# Altium PCB PCB_ROBOT_HUT_BUI.PcbDoc
Units mil, origin at the board's own origin, x right, y up, seen from the top; angles counter-clockwise.
Board outline 2813.48 x 3251.55 mil, 2 copper layers (Top Layer, Bottom Layer); 37 components, 47 nets, 170 pads, 6 vias.
Unrouted connection lines stored in the file: 1.
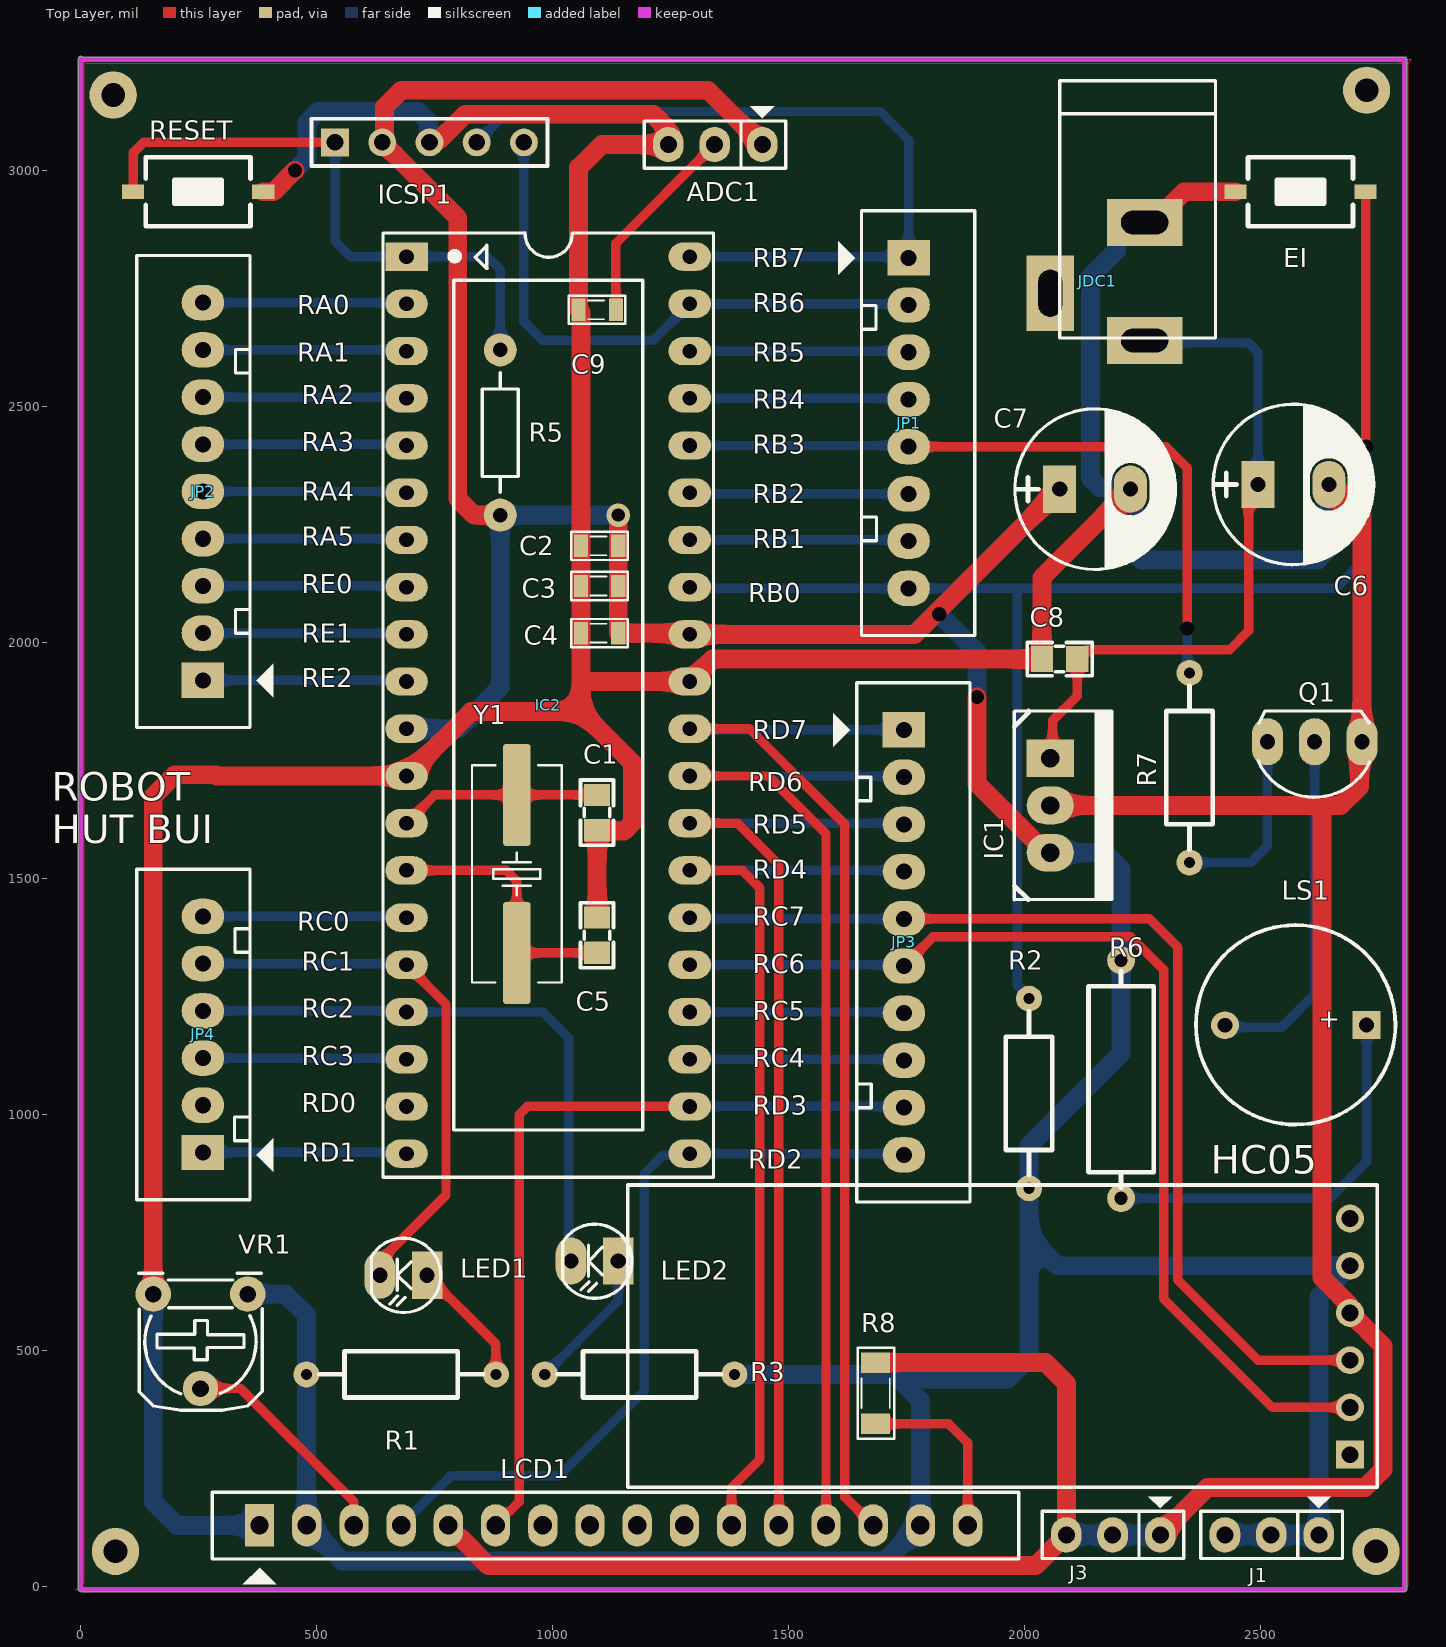
[diagram p0: Top Layer view]
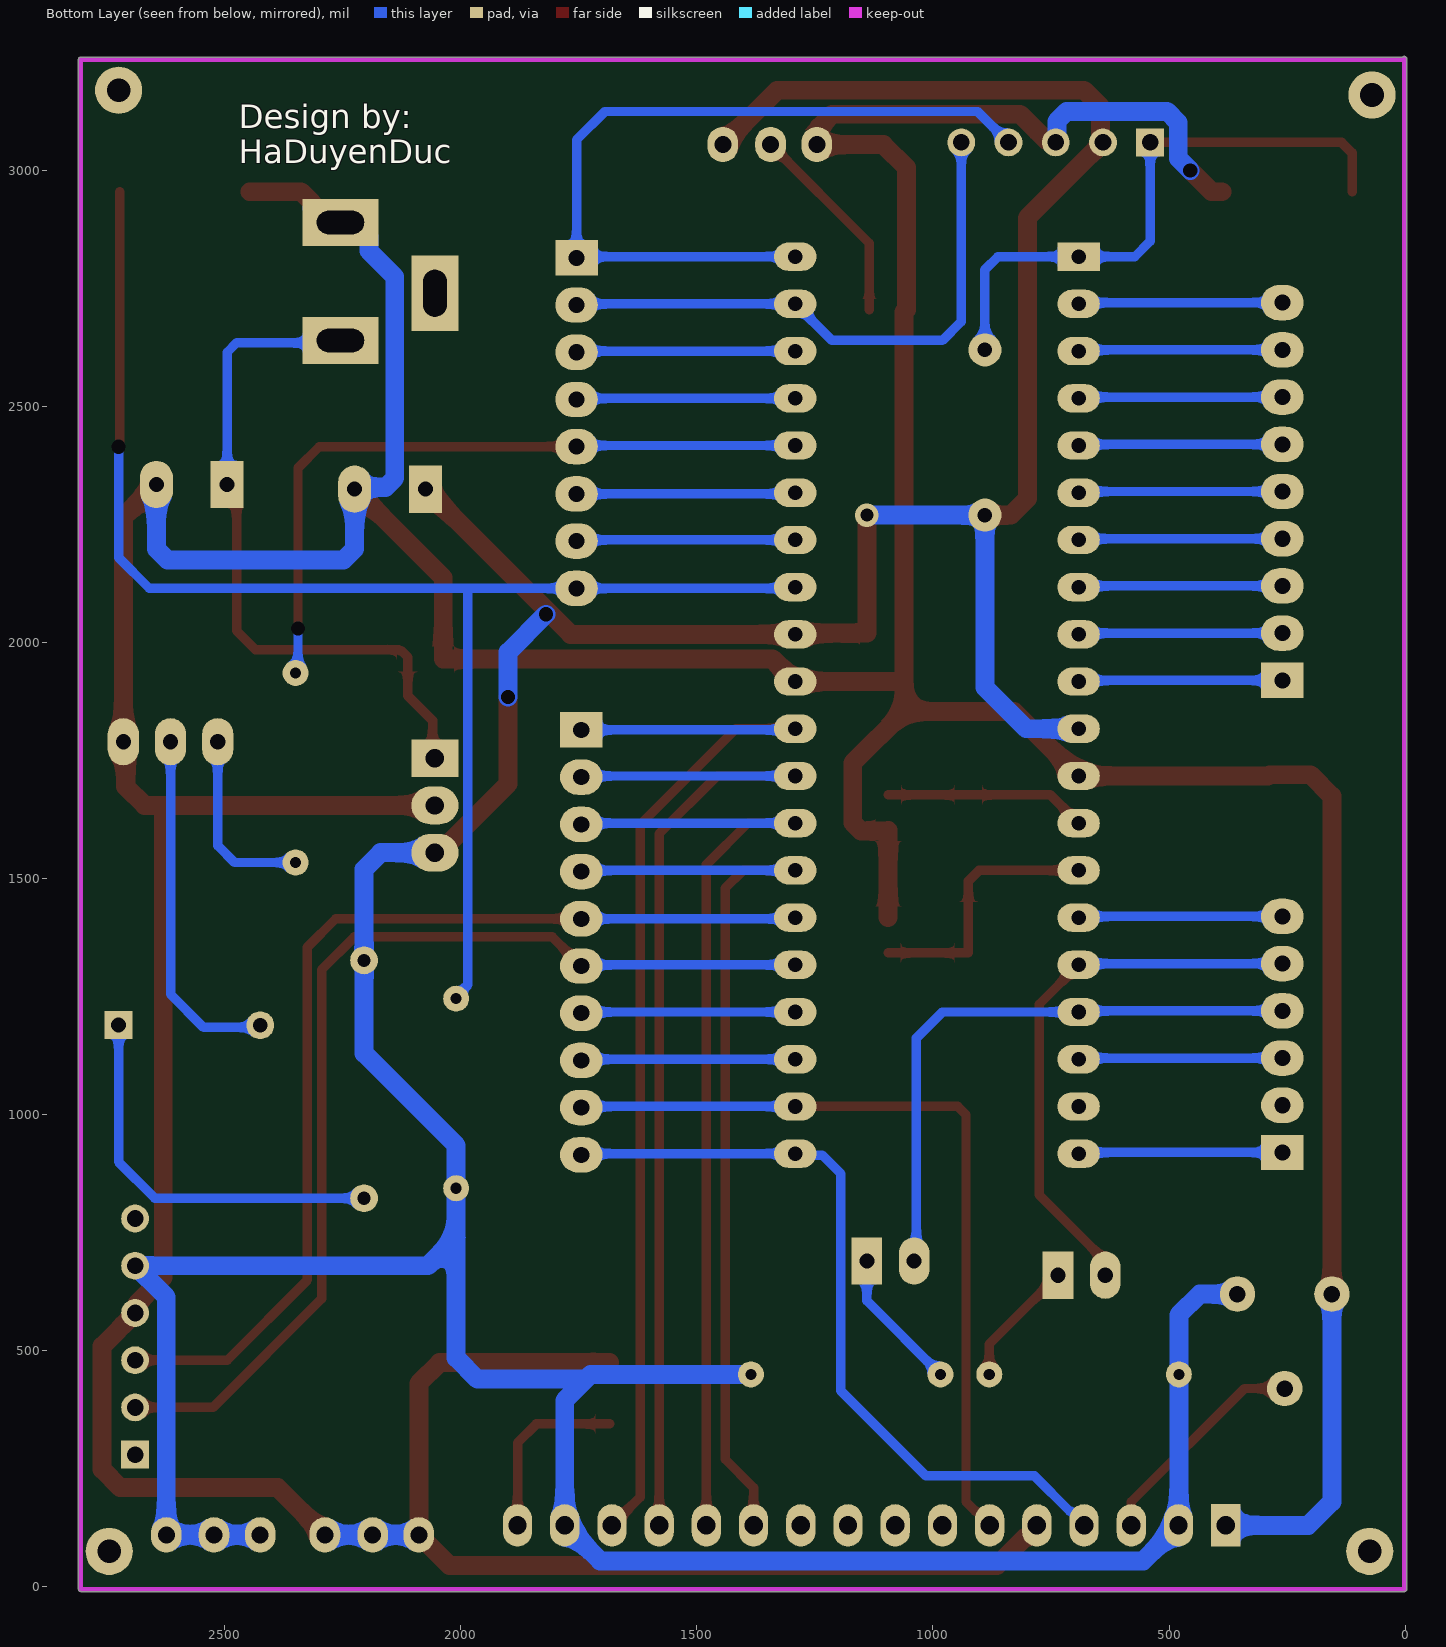
[diagram p1: Bottom Layer view, seen from below]

## Layer stack, top to bottom
Top Solder: solder mask 0.4, Solder Resist, Dk 3.5
Top Layer: signal copper 1.4
Dielectric 1: dielectric 12.6, FR-4, Dk 4.8
Bottom Layer: signal copper 1.4
Bottom Solder: solder mask 0.4, Solder Resist, Dk 3.5

## Board outline
-3.46,-5 ccw(c1.55,-5) 1.55,-10.02 2805,-10.02 ccw(c2805,-5) 2810.02,-5 2810.02,3235 ccw(c2805,3235) 2805,3240.02 5.18,3240.02 ccw(c1.57,3236.51) -3.46,3236.55

## Design rules (kind name [scope] priority, off if disabled: settings)
Clearance POLYGON [InPolygon] p1: gap=30 ignorepadtopadclearanceinfootprint=FALSE except(0: Arc-Hole Track-Hole SMDPad-Hole THPad-Hole Via-Hole Fill-Hole Poly-Hole Region-Hole Text-Hole)
Clearance [All] p2: gap=10 ignorepadtopadclearanceinfootprint=FALSE except(0: Arc-Hole Track-Hole SMDPad-Hole THPad-Hole Via-Hole Fill-Hole Poly-Hole Region-Hole Text-Hole)
DiffPairsRouting [All] p1: maxlimit=10 minlimit=10 mostfreqgap=10 toplayer_minwidth=10 toplayer_maxwidth=40 toplayer_prefwidth=20 bottomlayer_minwidth=10 bottomlayer_maxwidth=40 bottomlayer_prefwidth=20 maxuncoupledlength=500
PolygonConnect [All] p1: connectstyle=Relief reliefconductorwidth=10 reliefentries=4 polygonreliefangle="90 Angle" airgapwidth=10
RoutingVias [All] p1: holewidth=28 width=50 viastyle="Through Hole" minholewidth=20 minwidth=10 maxholewidth=30 maxwidth=15
SolderMaskExpansion [All] p1: expansion=4 istentingtop=FALSE
Width [All] p1: maxlimit=40 minlimit=10 preferedwidth=20
29 further rules are at their usual default settings.

## Components (designator, comment, footprint, x,y, rotation, side; value= is the part's Value field where it differs from the comment)
ADC1 "Jumper 3" JP3 1345,3055 r180 top value=J3
C1 "33pF" "tu 0805" 1095,1640 r270 top
C2 "104" SM-CAP-0805 1055,2205 r0 top value=0,1uF/300V
C3 "104" SM-CAP-0805 1055,2120 r0 top value=0,1uF/300V
C4 "104" SM-CAP-0805 1055,2020 r0 top value=0,1uF/300V
C5 "33pF" "tu 0805" 1095,1380 r90 top
C6 "100uF/35V" CP1.5/3.4 2495,2335 r0 top value=100uF/35V/50V
C7 "1000uF/16V" CP1.5/3.4 2075,2325 r0 top
C8 "104" "tu 0805" 2075,1965 r180 top
C9 "104" SM-CAP-0805 1050,2705 r0 top value=0,1uF/300V
EI "Nut Nhan 2 Chan SMD 3x6x2.5" "Nut Nhan 2 Chan SMD 3x6x2.5" 2585,2955 r180 top (schematic designator BT2)
HC05 "HC05 Bluetooth" "HC05 Bluethooth Nam" 2690,280 r90 top locked value="Connector 6"
IC1 "LM7805" QTO-220 2055,1755 r270 top
IC2 "16F877A" DIP40/W0.6 691.5,2817.48 r270 top locked
ICSP1 "ICSP-PIC" HDR1X5 540,3059.56 r0 top
J1 "Jumper 3" JP3 2524,110 r180 top value=J3
J3 "Jumper 3" JP3 2188,110 r180 top value=J3
JDC1 "Jac DC" DC-IN 2155,2765 r270 top
JP1 "JP8" CON8 1755,2815 r270 top value="Connector 8"
JP2 "connector" con9 260,1920 r90 top
JP3 "JP10" CON10 1745,1815 r270 top locked value="Connector 10"
JP4 "JP6" CON6 260,920 r90 top value="Connector 6"
LCD1 "LCD1602 XL" "LCD1602 with Jump" 380,130 r0 top locked
LED1 "LED" LED-3 735,660 r180 top value="LED 3 ly Single Colour"
LED2 "LED" LED-3 1140,690 r180 top value="LED 3 ly Single Colour"
LS1 "Coi Chip Speaker" "Coi Chip Speacker" 2725,1190 r180 top
Q1 "C1815" TO92 2615,1790 r180 top value=C9014
R1 "270R" "tro vach 1/4w" 680,450 r0 top
R2 "10k" "tro vach 1/4w" 2010,1045 r90 top
R3 "270R" "tro vach 1/4w" 1185,450 r180 top
R5 "10k" R1/4W 890,2620 r270 top
R6 "220k" "tro vach 1/2w" 2205,1075 r90 top
R7 "5.6k" "tro vach 1/4w" 2350,1735 r270 top
R8 "100" SM-RES-1206 1685,475 r270 top value="R1/4W - 1K"
RESET "Nut Nhan 2 Chan SMD 3x6x2.5" "Nut Nhan 2 Chan SMD 3x6x2.5" 250,2955 r180 top (schematic designator BT1)
VR1 "10K" VR 355,620 r180 top value="VR 10K"
Y1 "16Mhz" "Thach Anh 2 chan SMD" 925,1510 r90 top value=4Mhz

## Footprints (in the part's own frame and the unit in brackets; to place one, negate y for a bottom-side part, rotate by r counter-clockwise, add the part's x,y. Pads: shape width x height; smd on the part's side, far side on the other; paste and mask are expansions set on the pad)
"Coi Chip Speacker" [mm]
  rect 1.5x1.5 hole 0.8: 1(0,0)
  round 1.5 hole 0.8: 2(7.62,0.013)
  silkscreen extent -1.55,-5.38 9.18,5.36, body extent -2.22,-6 13.24,6, height 4.5
CON6 [mil] "CON6"
  rect 75x90 hole 34: 1(0,0)
  oval 75x90 hole 34: 2(100,0) 3(200,0) 4(300,0) 5(400,0) 6(500,0)
  silkscreen extent -100,-150 600,140, body extent -93,-91 592,135, height 276
CON8 [mil] "CON8"
  rect 75x90 hole 34: 1(0,0)
  oval 75x90 hole 34: 2(100,0) 3(200,0) 4(300,0) 5(400,0) 6(500,0) 7(600,0) 8(700,0)
  silkscreen extent -100,-150 800,140, body extent -92,-95 790,132, height 245
con9 [mil]
  rect 75x90 hole 34: 1(0,0)
  oval 75x90 hole 34: 2(100,0) 3(200,0) 4(300,0) 5(400,0) 6(500,0) 7(600,0) 8(700,0) 9(800,0)
  silkscreen extent -100,-150 900,140
CON10 [mil] "CON10"
  rect 75x90 hole 34: 1(0,0)
  oval 75x90 hole 34: 2(100,0) 3(200,0) 4(300,0) 5(400,0) 6(500,0) 7(600,0) 8(700,0) 9(800,0) 10(900,0)
  silkscreen extent -100,-150 1000,140
CP1.5/3.4 [mil] "Tu hoa 220->470uF,16V, 470uF/16V,25V"
  rect 70x100 hole 32: 1(0,0)
  oval 70x100 hole 32: 2(150,0)
  silkscreen extent -95,-170 245,170, body extent -85,-157 230,157, height 446
DC-IN [mil] "Jac DC input"
  rect 100x160 hole 50 slot 100 at 90 deg: 1(125,100) 2(-125,100)
  rect 160x100 hole 50 slot 100 at 0 deg: 3(25,-100)
  silkscreen extent -425,-80 120,250, body extent -410,-105 134,269, height 434
DIP40/W0.6 [mil] "40 PIN, W 600mil, Pin to pin 100mil"
  rect 60x90 hole 31: 1(0,0)
  oval 60x90 hole 31: 2(100,0) 3(200,0) 4(300,0) 5(400,0) 6(500,0) 7(600,0) 8(700,0) 9(800,0) 10(900,0) 11(1000,0) 12(1100,0) 13(1200,0) 14(1300,0) 15(1400,0) 16(1500,0) 17(1600,0) 18(1700,0) 19(1800,0) 20(1900,0) 21(1900,600) 22(1800,600) 23(1700,600) 24(1600,600) 25(1500,600) 26(1400,600) 27(1300,600) 28(1200,600) 29(1100,600) 30(1000,600) 31(900,600) 32(800,600) 33(700,600) 34(600,600) 35(500,600) 36(400,600) 37(300,600) 38(200,600) 39(100,600) 40(0,600)
  silkscreen extent -50,-50 1950,650, body extent -82,-10 1982,600, height 224
"HC05 Bluethooth Nam" [mm] "Connector; Header; 6 Position"
  rect 1.5x1.5 hole 0.9: 1(0,0)
  round 1.5 hole 0.9: 2(2.54,0) 3(5.08,0) 4(7.62,0) 5(10.16,0) 6(12.7,0)
  silkscreen extent -1.76,-1.46 14.51,38.86, body extent -1.52,-0.64 14.48,38.78, height 4.05
HDR1X5 [mm] "Connector; Header; 5 Position"
  rect 1.5x1.5 hole 0.9: 1(0,0)
  round 1.5 hole 0.9: 2(2.54,0) 3(5.08,0) 4(7.62,0) 5(10.16,0)
  silkscreen extent -1.27,-1.27 11.43,1.27, body extent -1.38,-1.26 11.57,1.24, height 8.52
JP3 [mil] "Jumper 3"
  oval 65x75 hole 36: 1(-100,0) 2(1,0) 3(99,0)
  silkscreen extent -150,-81 150,50, body extent -150,-60 150,55, height 355
"LCD1602 with Jump" [mil] "LCD dipslay 16x2, 16 pin"
  rect 62x90 hole 39: 1(0,0)
  oval 62x90 hole 39: 2(100,0) 3(200,0) 4(300,0) 5(400,0) 6(500,0) 7(600,0) 8(700,0) 9(800,0) 10(900,0) 11(1000,0) 12(1100,0) 13(1200,0) 14(1300,0) 15(1400,0) 16(1500,0)
  silkscreen extent -100,-125 1608,70, body extent -320,-1353 2850,84, height 764
LED-3 [mil] "LED 2 PIN, 3ly Only colour"
  rect 65x100 hole 32: 1(0,0)
  oval 65x100 hole 32: 2(100,0)
  silkscreen extent -29,-78 118,79, body extent -29,-75 109,75, height 256
"Nut Nhan 2 Chan SMD 3x6x2.5" [mm] "Switch SMD type"
  rect 1.2x0.8 smd: 1(-3.5,0) 2(3.5,0)
  silkscreen extent -2.82,-1.85 2.82,1.85, body extent -3.05,-1.85 3.05,1.85, height 2.5
QTO-220 [mil] "TO-220 - 1-2-3"
  rect 80x100 hole 39: 1(0,0)
  oval 80x100 hole 39: 2(100,0) 3(200,0)
  silkscreen extent -100,-76 300,130, body extent -119,-64 322,121, height 905
R1/4W [mil] "R 1/4W, 2 Pin, 350mil"
  round 70 hole 31: 1(0,0) 2(350,0)
  silkscreen extent 48,-38 302,38, body extent -40,-47 386,47, height 111
SM-CAP-0805 [mil]
  rect 30x47.24 smd: 1(6,0) 2(85,0)
  silkscreen extent -15,-30 105,30, body extent 6,-25 84,25, height 31
SM-RES-1206 [mm]
  rect 1.1x1.55 smd: 1(0,0) 2(3.302,0)
  silkscreen extent -0.8,-0.97 4.1,1, body extent 0.05,-0.8 3.25,0.8, height 1.02
"Thach Anh 2 chan SMD" [mm] "SMD Crystal HC49/US-SM package"
  round 0.508 on Mech15: 0(0,0)
  rrect25% 5.5x1.5 smd: 1(-4.25,0) 2(4.25,0)
  silkscreen extent -5.84,-2.41 5.84,2.41, body extent -6.4,-2.41 6.4,2.42, height 4.29
TO92 [mil] "TO-92"
  oval 66x100 hole 32: 1(-100,0) 2(0,0) 3(100,0)
  silkscreen extent -117,-65 120,118, body extent -109,-66 109,95, height 245
"tro vach 1/2w" [mm]
  round 1.5 hole 0.7: 1(-6.4,0) 2(6.4,0)
  silkscreen extent -5.84,-1.75 5.84,1.75, body extent -6.62,-1.75 6.62,1.75, height 3.5
"tro vach 1/4w" [mm]
  round 1.4 hole 0.6: 1(-5.1,0) 2(5.1,0)
  silkscreen extent -4.39,-1.25 4.42,1.25, body extent -5.38,-1.2 5.38,1.2, height 2.41
"tu 0805" [mm] "Compoment SMD 80x50mil"
  rect 1.2x1.4 smd: 1(-0.946,-0.003) 2(0.954,-0.003)
  silkscreen extent -1.75,-0.89 1.75,0.89, body extent -1.01,-0.64 1.01,0.63, height 0.61
VR [mil] "Resistor Variable"
  round 75 hole 35: 1(0,0) 2(100,200) 3(200,0)
  silkscreen extent -31,-44 231,246, body extent -87,-30 307,372, height 165

## Part data
ADC1 J1 J3: library part JP3
C1 C5: library part "Tu 0805 33pF 50V 10%", "Dán", Chung_Loai=Dán, Don_Vi=Con, Ma_Hang=MH004563, So_Chan=2, Ten_Linh_Kien="Tụ 0805 33p 10% 50V"
C2 C3 C4 C9: library part "CAP SMD", Designed by=VanDungEvn
C6: library part CP3, "Cap 100uF/35V - 470uF/16V", Description 1="1000uF/6,3V - 470uF/16V - 330uF - 25V", Description 2="220uF/35V - 100uF/50V - 63V - 4,7uF/200V", Description 3="22uF => 33uF100V - 3,3uF => 4,7uF/250V", Description 4="2,2uF =>3,3uF/350 - 2,2uF/400V - 1uF/450V"
C7: library part CP4, "Cap 1000uF/16V - 220uF/50V", Description 1="2200uF-3300uF/6,3V - 1000uF-2200uF/10V", Description 2="1000uF/16V - 470uF => 1000uF/25V - 100uF/100V", Description 3=330uF>470uF/35V_220uF>470uF/50V_10uF>22uF/250V, Description 4="220uF => 330uF/63V - 10uF =>33uF/160 - 200V", Description 5="4,7uF>10uF/250V_3,3uF>10uF/400V - 2,2uF>4,7uF/450V"
C8: library part "Tu 0805 104 50V 10%", "Dán", Chung_Loai=Dán, Don_Vi=Con, Ma_Hang=MH004551, So_Chan=2, Ten_Linh_Kien="Tụ 0805 104-100nF 10% 50V"
HC05: "Bluetooth HC05"
IC1: library part LM78xx, "On ap +, from + 5 to + 24VDC"
IC2: library part "PIC 16F877A"
ICSP1: "Header, 5-Pin", LatestRevisionDate=17-Jul-2002, LatestRevisionNote="Re-released for DXP Platform.", Publisher="Altium Limited"
JDC1: library part DCIN, "Jac DC input"
JP1: library part Con8, "Connector 8"
JP2: library part Con9, "connector 9"
JP3: library part Con10, "Connector 10"
JP4: library part Con6, "Connector 6"
LCD1: "LCD 1602 Xanh Lá", CHIP=HD44780, Ma_Hang=67HZ, NCC=NSHOP, Ten="Màn hình LCD 1602 Xanh Lá"
LED1 LED2: "LED Single colour Green and Red"
LS1: "Còi chip"
Q1: "NPN transistor"
R1 R3: library part "Tro Vach 1/4W 5% 270R", "Cắm", Chung_Loai=Cắm, Don_Vi=Con, Ma_Hang=MH007303, So_Chan=2, Ten_Linh_Kien="Trở Vạch 1/4w 5% 270R"
R2: library part "Tro Vach 1/4W 1% 10k", "Cắm", Chung_Loai=Cắm, Don_Vi=Con, Ma_Hang=MH006349, So_Chan=2, Ten_Linh_Kien="Trở Vạch 1/4w 1% 10k"
R5: library part Res, "Res"
R6: library part "Tro Vach 1/2W 5% 220k", "Cắm", Chung_Loai=Cắm, Don_Vi=Con, Ma_Hang=MH006190, So_Chan=2, Ten_Linh_Kien="Trở 5% 1/2w 220k"
R7: library part "Tro Vach 1/4W 5% 5.6k", "Cắm", Chung_Loai=Cắm, Don_Vi=Con, Ma_Hang=MH007323, So_Chan=2, Ten_Linh_Kien="Trở Vạch 1/4w 5% 5.6k"
R8: library part R, "Resistor 1/4W"
VR1: library part VR, "Var Resistor"
Y1: library part "Thach Anh 2 chan SMD", "Crystal For all Crystal 2pin."
EI RESET: Ma_Hang=MH001036, Ten="Nút Nhấn 2 Chân 3x6x2.5MM SMD"

## Free pads (board coordinates)
  round 100 hole 50: 2(70,3160) 3(2725,3170) 4(2745,75) 5(75,75)

## Via types
v1: diameter 15/15 (per signal layer), hole 30, Top Layer to Bottom Layer, tented both sides, 5 vias
v2: diameter 50/50 (per signal layer), hole 28, Top Layer to Bottom Layer, tented both sides, 1 vias

## Nets (pads, with @x,y where several pads share a name; then routed paths per layer and width w, separated by ;. In a path a pad name is that pad's centre, name@x,y a point inside that pad or via, vN(x,y) a via of type N, cw(c..) or ccw(c..) an arc to the next point about the centre after c; other vN are vias at no path point)
5V: ADC1.1 C2.2 C3.2 C4.2 C7.1 HC05.5 IC1.3 IC2.11 IC2.32 ICSP1.2 J1.1 J1.2 J1.3 LCD1.2 LCD1.15 R1.1 R2.1 R3.1 R5.2 R6.2 VR1.1 | length 10365.4
  Top Layer w40: R5.2 835,2270 800,2305 800,2899.56 ICSP1.2 643.65,3063.21 643.65,3076.68 645,3078.04 645,3135 680,3170 1330,3170 ADC1.1 ; v2(1140,2270) C2.2 C3.2 C4.2 1288.98,2020 IC2.32 IC2.32@1297.48,2017.48 ; IC2.32@1300,2020 IC2.32@1297.48,2017.48 ; v1(1900,1885) 1900,1701.01 2046.01,1555 IC1.3 ; C7.1 2075,2310 2060,2295 2045,2295 1767.48,2017.48 IC2.32@1297.48,2017.48
  Bottom Layer w40: VR1.1 435,620 479.21,575.79 R1.1 479.21,130.79 LCD1.2 480,121.95 496.95,105 504.73,105 554.73,55 1705.27,55 1762.06,111.79 1769.84,111.79 1780,121.95 LCD1.15 1780,395 1735,440 ; IC2.11 802.48,1817.48 890,1905 R5.2 v2(1140,2270) ; R3.1 1725,450 1735,440 ; v1(1820,2060) 1900,1980 v1(1900,1885) ; IC1.3 2170,1555 2205,1520 R6.2 2205,1130 2010,935 R2.1 2010,740 ; J1.3 J1.2 J1.1 2624,614 HC05.5 2070,680 2010,740 ; 1735,440 1965,440 2010,485 2010,740
GND: ADC1.3 C1.2 C2.1 C3.1 C4.1 C5.2 C6.2 C7.2 C8.2 C9.1 EI.2 HC05.4 IC1.2 IC2.12 IC2.31 ICSP1.3 J3.1 J3.2 J3.3 JDC1.2 LCD1.1 LCD1.5 Q1.1 R8.1 RESET.1 VR1.3 | length 14504.7
  Top Layer w40: VR1.3 155,1675 200,1720 287.48,1720 290,1717.48 IC2.12 ; RESET.1 410,2955 v1(455,3000) ; IC2.12@710.33,1736.31 828.02,1854 1061,1854 ; ICSP1.3 743.65,3063.21 759.46,3063.21 815.34,3119.09 1214.09,3119.09 1241.22,3091.96 1241.22,3059.78 ADC1.3 1105,3055 1056,3006 C9.1 1061,2700 C2.1 C3.1 C4.1 1061,1920 ; LCD1.5 780,121.95 796.95,105 804.73,105 864.73,45 2024,45 J3.3 2089,431 2045,475 R8.1 ; C1.2 C1.2@1095.13,1602.16 ; C5.2 C1.2@1095.13,1602.16 ; IC1.2 2630,1655 ; C7.2 2225,2318.12 2201.88,2295 2195,2295 2037.43,2137.43 C8.2 1339.93,1965.13 1310.33,1935.53 1310.33,1926.72 1301.09,1917.48 IC2.31 1063.52,1917.48 1061,1920 ; JDC1.2 2285,2890 2315,2920 2315,2931.57 2338.43,2955 EI.2 ; J3.1 2388,210 2721.48,210 2760,248.52 2760,510 HC05.4 2686.35,583.65 2686.35,599.46 2630.47,655.34 2630.47,1654.53 2630,1655 ; C6.2 2645,2328.12 2668.12,2305 2675,2305 2715,2265 Q1.1 2710.03,1785.03 Q1.1@2710.03,1749.64 ; Q1.1@2710,1749.62 2710,1695 2670,1655 2630,1655 ; 1061,1854 1061,1920 ; 1061,1854 1170,1745 1170,1618.43 1152.45,1600.88 1096.41,1600.88 C1.2@1095.13,1602.16
  Bottom Layer w40: VR1.3 155,180 205,130 LCD1.1 ; v1(455,3000) 480.47,3025.47 480.47,3101.52 503.96,3125 716.57,3125 737.7,3103.87 737.7,3061.87 ICSP1.3 ; J3.3 J3.2 J3.1 ; JDC1.2@2315,2920 2285,2890 JDC1.2 2225,2890 2195,2860 2195,2830 2140,2775 2140,2348.43 2159.54,2328.89 2221.11,2328.89 C7.2 2225,2198.43 2248.43,2175 2621.57,2175 2645,2198.43 C6.2
NetADC1_2: ADC1.2 C9.2 | length 436.6
  Top Layer w20: C9.2 1135,2846 ADC1.2
NetC6_1: C6.1 C8.1 IC1.1 JDC1.1 | length 1472.4
  Top Layer w20: IC1.1 2060,1760 2060,1835 2112.23,1887.23 C8.1 2112.23,1969.07 2125.85,1982.69 2129.79,1982.69 2132.09,1985 2435,1985 2475,2025 2475,2315 C6.1
  Bottom Layer w20: JDC1.1 2260,2635 2475,2635 2495,2615 C6.1
NetLCD1_3: LCD1.3 VR1.2 | length 474.4
  Top Layer w20: VR1.2 340,420 580,180 LCD1.3
NetLCD1_16: LCD1.16 R8.2 | length 386.6
  Top Layer w20: R8.2 1840,345 1880,305 LCD1.16
NetLED1_1: LED1.1 R1.2 | length 270.4
  Top Layer w20: LED1.1 880.79,514.21 R1.2
NetLED2_1: LED2.1 R3.2 | length 318.7
  Top Layer w20: R3.2 R3.2@984.21,464.21
  Bottom Layer w20: R3.2 1140,605.79 LED2.1
NetLS1_1: LS1.1 R6.1 | length 841.9
  Bottom Layer w20: R6.1 2648.03,823.03 2725,900 LS1.1
NetLS1_2: LS1.2 Q1.2 | length 755.9
  Bottom Layer w20: LS1.2 2429.5,1185 2545,1185 2615,1255 Q1.2
NetQ1_3: Q1.3 R7.2 | length 399.8
  Bottom Layer w20: R7.2 2479.21,1534.21 2515,1570 Q1.3
OSC1: C1.1 IC2.13 Y1.2 | length 428.1
  Top Layer w20: IC2.13 751.34,1677.32 Y1.2 C1.1@1094.77,1677.32
OSC2: C5.1 IC2.14 Y1.1 | length 565.2
  Top Layer w20: IC2.14 902.52,1517.48 925,1495 Y1.1 C5.1@1095.04,1342.68
PGC: IC2.39 ICSP1.5 JP1.2 | length 1240.7
  Bottom Layer w20: ICSP1.5 940,2680 980,2640 1214.02,2640 IC2.39 JP1.2@1752.52,2717.48
PGD: IC2.40 ICSP1.4 JP1.1 | length 1678
  Bottom Layer w20: ICSP1.4 905.44,3125 1695,3125 1755,3065 JP1.1 ; IC2.40 JP1.1@1752.52,2817.48
RA0: IC2.2 JP2.9 | length 429
  Bottom Layer w20: JP2.9 IC2.2@688.98,2720
RA1: IC2.3 JP2.8 | length 429
  Bottom Layer w20: JP2.8 IC2.3@688.98,2620
RA2: IC2.4 JP2.7 | length 429
  Bottom Layer w20: JP2.7 IC2.4@688.98,2520
RA3: IC2.5 JP2.6 | length 429
  Bottom Layer w20: JP2.6 IC2.5@688.98,2420
RA4: IC2.6 JP2.5 | length 429
  Bottom Layer w20: JP2.5 IC2.6@688.98,2320
RA5: IC2.7 JP2.4 | length 429
  Bottom Layer w20: JP2.4 IC2.7@688.98,2220
RB0: EI.1 IC2.33 JP1.8 R2.2 | length 3119
  Top Layer w20: EI.1 2722.8,2417.2 v1(2725,2415)
  Bottom Layer w20: IC2.33 1293.98,2115 JP1.8 1980,2115 ; R2.2 2010,1250.06 1985,1275.06 1985,2110 1980,2115 ; v1(2725,2415) 2725,2180 2660,2115 1980,2115
RB1: IC2.34 JP1.7 | length 461
  Bottom Layer w20: IC2.34 JP1.7@1752.52,2217.48
RB2: IC2.35 JP1.6 | length 461
  Bottom Layer w20: IC2.35@1293.98,2315 JP1.6
RB3: IC2.36 JP1.5 R7.1 | length 1509.5
  Top Layer w20: JP1.5 2300,2415 2345,2370 v1(2345,2030)
  Bottom Layer w20: IC2.36 1752.52,2417.48 JP1.5 ; v1(2345,2030) 2345,1940.79 R7.1
RB4: IC2.37 JP1.4 | length 461
  Bottom Layer w20: IC2.37 JP1.4@1752.52,2517.48
RB5: IC2.38 JP1.3 | length 461
  Bottom Layer w20: IC2.38 JP1.3@1752.52,2617.48
RC0: IC2.15 JP4.6 | length 429
  Bottom Layer w20: JP4.6 IC2.15@688.98,1420
RC1: IC2.16 JP4.5 LED1.2 | length 1179
  Top Layer w20: LED1.2 635,690 775,830 775,1233.98 IC2.16
  Bottom Layer w20: JP4.5 IC2.16@688.98,1320
RC2: IC2.17 JP4.4 LED2.2 | length 1269.8
  Bottom Layer w20: JP4.4 IC2.17@688.98,1220 ; IC2.17 980,1217.48 1035,1162.48 1035,695 LED2.2
RC3: IC2.18 JP4.3 | length 429
  Bottom Layer w20: JP4.3 IC2.18@688.98,1120
RC4: IC2.23 JP3.8 | length 451
  Bottom Layer w20: IC2.23 JP3.8@1742.52,1117.48
RC5: IC2.24 JP3.7 | length 451
  Bottom Layer w20: IC2.24 JP3.7@1742.52,1217.48
RC6: HC05.2 IC2.25 JP3.6 | length 2246.1
  Top Layer w20: JP3.6 1806.5,1376.5 2225.52,1376.5 2295,1307.01 2295,610 2525,380 HC05.2
  Bottom Layer w20: IC2.25 1742.52,1317.48 JP3.6
RC7: HC05.3 IC2.26 JP3.5 | length 2199.8
  Top Layer w20: JP3.5 2265,1415 2325,1355 2325,650 2495,480 HC05.3
  Bottom Layer w20: IC2.26 1293.98,1415 JP3.5
RD0: IC2.19 JP4.2
RD1: IC2.20 JP4.1 | length 429
  Bottom Layer w20: JP4.1 IC2.20@688.98,920
RD2: IC2.21 JP3.10 LCD1.4 | length 1659.7
  Bottom Layer w20: LCD1.4 680,132.63 707.5,160.13 710.13,160.13 785,235 1015,235 1195,415 1195,875 1234.56,914.56 1288.58,914.56 IC2.21 JP3.10@1742.52,917.48
RD3: IC2.22 JP3.9 LCD1.6 | length 1712
  Top Layer w20: LCD1.6 880,132.63 907.5,160.13 910.13,160.13 930,180 930,1000 947.48,1017.48 IC2.22
  Bottom Layer w20: IC2.22 JP3.9@1742.52,1017.48
RD4: IC2.27 JP3.4 LCD1.11 | length 1989.9
  Top Layer w20: IC2.27 1402.52,1517.48 1440,1480 1440,270 1380,210 LCD1.11
  Bottom Layer w20: IC2.27 JP3.4@1742.52,1517.48
RD5: IC2.28 JP3.3 LCD1.12 | length 2075.8
  Top Layer w20: IC2.28 1392.52,1617.48 1480,1530 LCD1.12
  Bottom Layer w20: IC2.28 JP3.3@1742.52,1617.48
RD6: IC2.29 JP3.2 LCD1.13 | length 2255.3
  Top Layer w20: IC2.29 1457.52,1717.48 1580,1595 LCD1.13
  Bottom Layer w20: IC2.29 JP3.2@1742.52,1717.48
RD7: IC2.30 JP3.1 LCD1.14 | length 2373.2
  Top Layer w20: IC2.30 1417.52,1817.48 1620,1615 1620,190 LCD1.14
  Bottom Layer w20: IC2.30@1293.98,1815 JP3.1
RE0: IC2.8 JP2.3 | length 432.5
  Bottom Layer w20: JP2.3 688.98,2120 IC2.8
RE1: IC2.9 JP2.2 | length 429
  Bottom Layer w20: JP2.2 IC2.9@688.98,2020
RE2: IC2.10 JP2.1 | length 429
  Bottom Layer w20: JP2.1 IC2.10@688.98,1920
RST: IC2.1 ICSP1.1 R5.1 RESET.2 | length 1273.7
  Top Layer w20: RESET.2 112.2,3037.2 134.56,3059.56 ICSP1.1
  Bottom Layer w20: ICSP1.1 540,2850 572.52,2817.48 IC2.1 862.52,2817.48 890,2790 R5.1
pads on no net: HC05.1 HC05.6 JDC1.3 LCD1.7 LCD1.8 LCD1.9 LCD1.10 Y1.0

## Polygon pours and split planes (outlines as drawn)
no net on Bottom Layer "NONET_L02_P000" (solid, shelved, pour order 0): 0,3240 5,3235 2805,3235 2805,-5 0,-5
no net on Top Layer "NONET_L01_P005" (solid, shelved, pour order 5): 5,3235 2805,3235 2812.5,3227.5 2805,3220 2805,-5 5,-5 0,0 5,5
no net on Top Layer "NONET_L01_P004" (solid, shelved, pour order 4): 6.88,3233.12 2791.88,3233.12 2802.5,3222.5 2802.5,-7.5 7.5,-7.5 5,-5 6.88,-3.12
no net on Top Layer "NONET_L01_P003" (solid, shelved, pour order 3): 5,3235 2790,3235 2802.5,3222.5 2802.5,-7.5 12.5,-7.5 2.5,2.5 8.75,8.75 8.75,3231.25
GND on Top Layer "NONET_L01_P001" (solid, shelved, pour order 1): -10,-5 2805,-5 2805,3220 2820,3235 5,3235 5,5 0,0 10,-10 20,-10
no net on Top Layer "NONET_L01_P002" (solid, shelved, pour order 2): 5,-7.5 5,3235 12.5,3227.5 2812.5,3227.5 2812.5,2.5 2802.5,-7.5

## Keep-outs
Keep-Out Layer:
  lines w10: 1.55,-5 2805,-5 2805,3235 26.06,3235 3.1,3235 1.55,3236.55 1.55,-5

## Silkscreen, mask and mechanical layers (free items; w line width, h text height)
Top Overlay:
  text "RB7" at 1425,2795 h40
  text "RB6" at 1425,2700 h40
  text "RA0" at 460,2695 h40
  text "RA1" at 460,2595 h40
  text "RB5" at 1425,2595 h40
  text "RA2" at 470,2505 h40
  text "RB4" at 1425,2495 h40
  text "RA3" at 470,2405 h40
  text "RB3" at 1425,2400 h40
  text "RA4" at 470,2300 h40
  text "RB2" at 1425,2295 h40
  text "RA5" at 470,2205 h40
  text "RB1" at 1425,2200 h40
  text "RE0" at 470,2105 h40
  text "RB0" at 1415,2085 h40
  text "RE1" at 470,2000 h40
  text "RE2" at 470,1905 h40
  text "RD7" at 1425,1795 h40
  text "RD6" at 1415,1685 h40
  text "RD5" at 1425,1595 h40
  text "ROBOT / HUT BUI" at -60,1575 h60
  text "RD4" at 1425,1500 h40
  text "RC7" at 1425,1400 h40
  text "RC0" at 460,1390 h40
  text "RC1" at 470,1305 h40
  text "RC6" at 1425,1300 h40
  text "RC2" at 470,1205 h40
  text "RC5" at 1425,1200 h40
  text "RC3" at 470,1105 h40
  text "RC4" at 1425,1100 h40
  text "RD0" at 470,1005 h40
  text "RD3" at 1425,1000 h40
  text "RD1" at 470,900 h40
  text "RD2" at 1415,885 h40
Bottom Overlay:
  text "Design by: / HaDuyenDuc" at 2470,3015 h50

## Text inside footprints (layer, text, board x,y; h text height)
LS1: Top Overlay "+" at 2669.5,1218 h40 r180